# Altium PCB pcb.PCBDOC
Units mil, origin at the board's own origin, x right, y up, seen from the top; angles counter-clockwise.
Board outline 1496.06 x 669.29 mil, 10 copper layers (TopLayer, MidLayer1, MidLayer2, MidLayer3, MidLayer4, MidLayer5, MidLayer6, MidLayer7, MidLayer8, BottomLayer); 12 components, 12 nets, 46 pads, 0 vias.
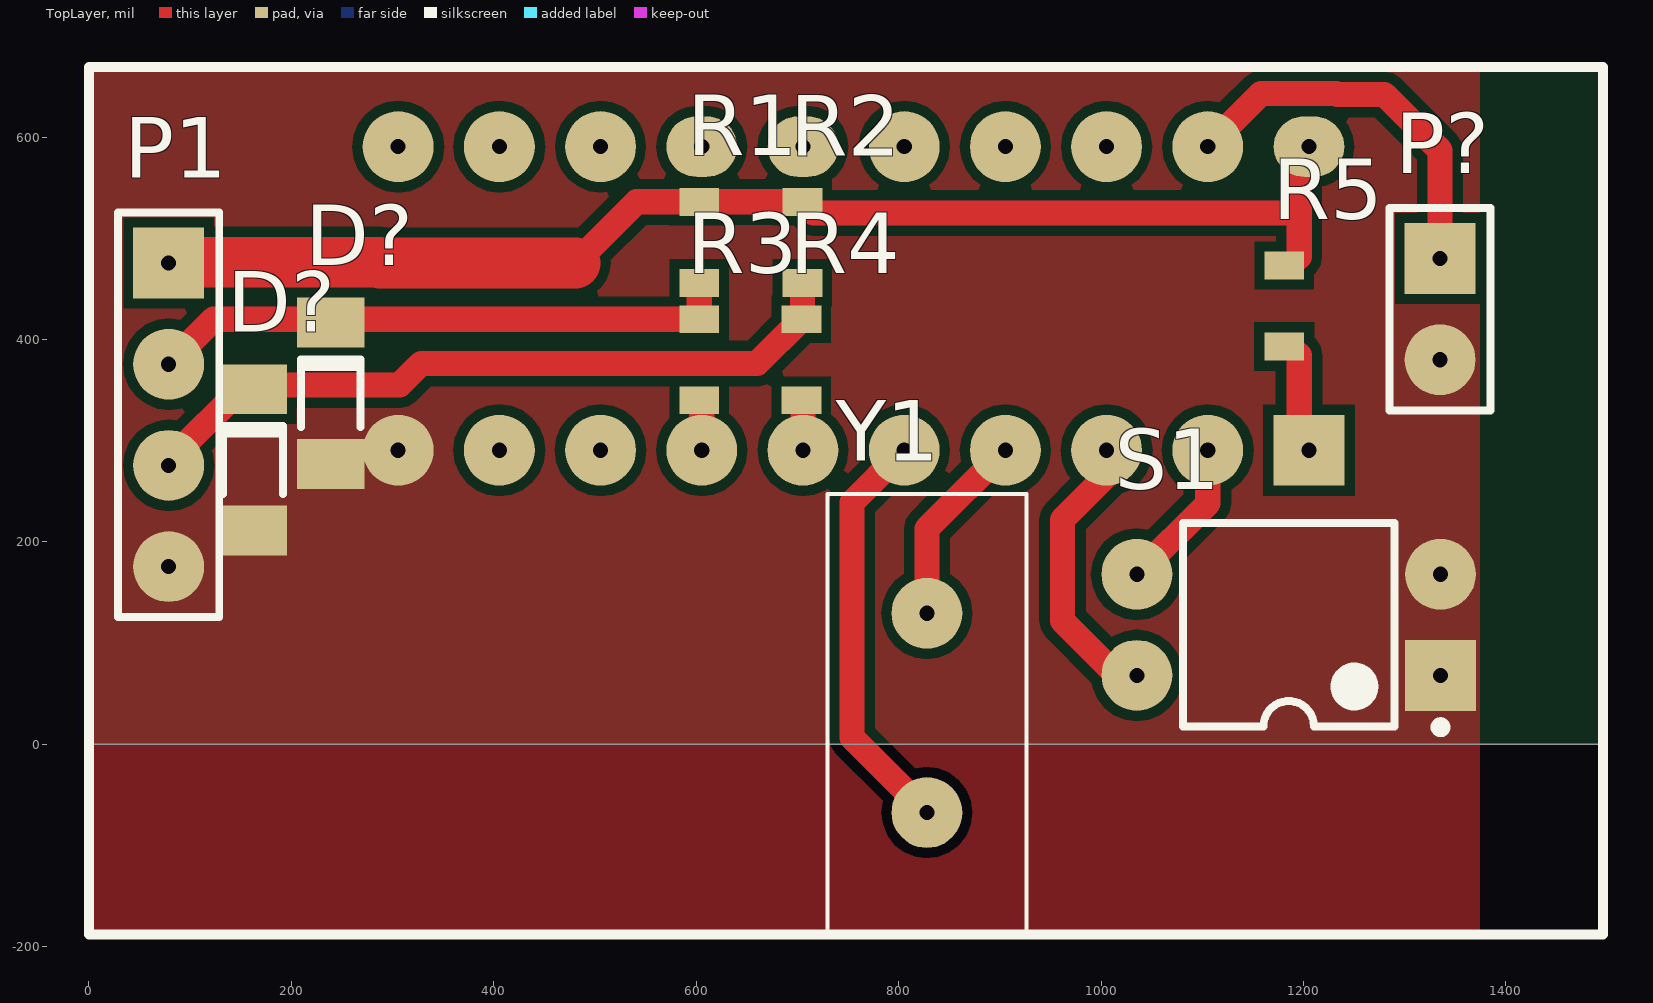
[diagram p0: TopLayer view]
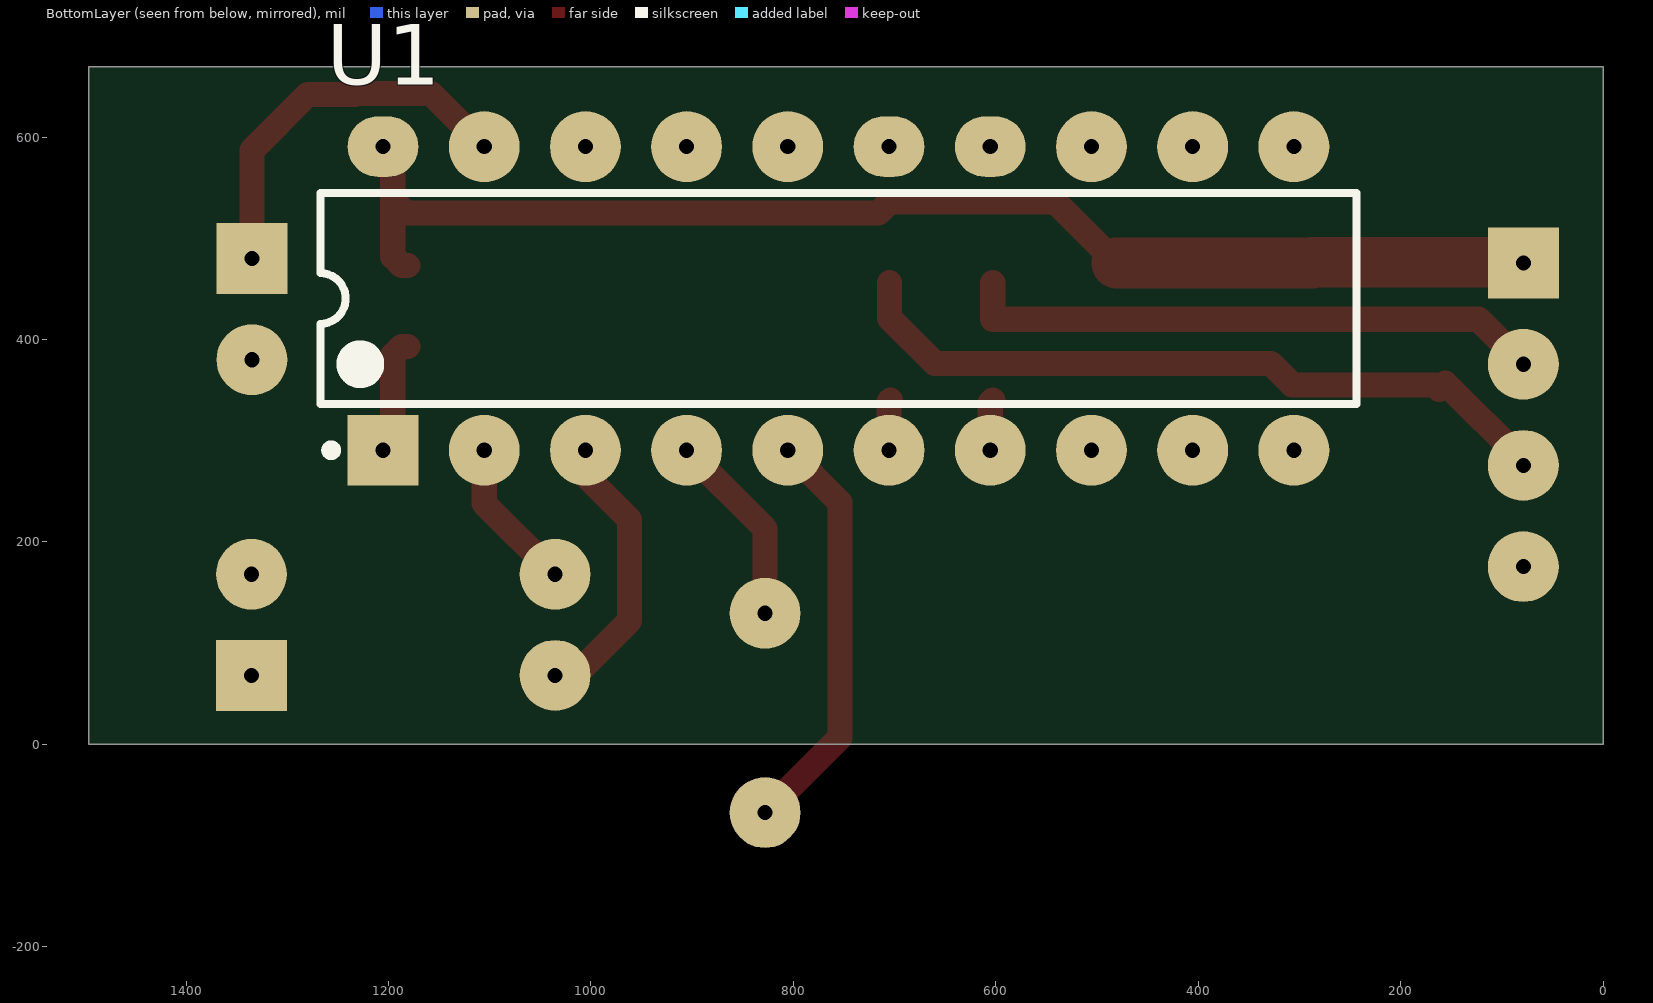
[diagram p1: BottomLayer view, seen from below]

## Layer stack, top to bottom
TopSolder: solder mask 0.4, Solder Resist, Dk 3.5
TopLayer: signal copper 1.4
Dielectric1: core 12.6, FR-4, Dk 4.8
MidLayer1: signal copper 1.4
Dielectric2: prepreg 12.6, FR-4, Dk 4.8
MidLayer2: signal copper 1.4
Dielectric3: core 12.6, FR-4, Dk 4.8
MidLayer3: signal copper 1.4
Dielectric4: prepreg 12.6, FR-4, Dk 4.8
MidLayer4: signal copper 1.4
Dielectric5: core 12.6, FR-4, Dk 4.8
MidLayer5: signal copper 1.4
Dielectric6: prepreg 12.6, FR-4, Dk 4.8
MidLayer6: signal copper 1.4
Dielectric7: core 12.6, FR-4, Dk 4.8
MidLayer7: signal copper 1.4
Dielectric8: prepreg 12.6, FR-4, Dk 4.8
MidLayer8: signal copper 1.4
Dielectric9: core 12.6, FR-4, Dk 4.8
BottomLayer: signal copper 1.4
BottomSolder: solder mask 0.4, Solder Resist, Dk 3.5

## Board outline
0,0 0,669.29 1496.06,669.29 1496.06,0

## Design rules (kind name [scope] priority, off if disabled: settings)
Clearance [All] p1: gap=10 ignorepadtopadclearanceinfootprint=FALSE except(0: Arc-Hole Track-Hole SMDPad-Hole THPad-Hole Via-Hole Fill-Hole Poly-Hole Region-Hole Text-Hole)
ComponentClearance [All] p1 off: gap=10 collisioncheckmode=3 verticalgap=10 showdistances=FALSE
FabricationTestPointUsage TestPointUsage [All] p1: valid=0 allowmultiple=FALSE
FabricationTestpoint Testpoint [All] p1: side=3 testpointundercomponent=TRUE minsize=40 maxsize=100 preferedsize=60 minholesize=20 maxholesize=40 preferedholesize=32 testpointgrid=1 allowsidetop=TRUE allowsidebottom=TRUE usegrid=TRUE gridtolerance=0.01
Height [All] p1 off: minheight=0 maxheight=1000 prefheight=500
PasteMaskExpansion PasteMaskExpansion_1 [InComponent('P1')] p1: expansion=-150
PasteMaskExpansion [All] p2: expansion=0
PlaneClearance [All] p1: clearance=10
PolygonConnect [All] p1: connectstyle=Direct reliefconductorwidth=10 reliefentries=4 polygonreliefangle="90 Angle" airgapwidth=10
RoutingVias [All] p1: holewidth=28 width=50 viastyle="Through Hole" minholewidth=28 minwidth=50 maxholewidth=28 maxwidth=50
SilkToSolderMaskClearance SilkscreenOverComponentPads [IsPad] p1: minsilkscreentomaskgap=10 clearancetoexposedcopper=TRUE
SolderMaskExpansion [All] p1: expansion=2
Width [All] p1 off: maxlimit=10 minlimit=10 preferedwidth=10
23 further rules are at their usual default settings.

## Components (designator, comment, footprint, x,y, rotation, side; value= is the part's Value field where it differs from the comment)
D? "Diode" SOD80C 239,347 r90 top
D? "Diode" SOD80C 162,281 r90 top
P1 "Header 4" HDR1X4 78.74,475.59 r270 top
P? "Header 2" HDR1X2 1335,480 r270 top
R1 "Res1" 0603x 603,496 r90 top value=1K
R2 "Res1" 0603x 705,496 r90 top value=1K
R3 "Res1" 0603x 603,380 r90 top value=1K
R4 "Res1" 0603x 704,380 r90 top value=1K
R5 "Res1" 0603x 1181.1,433.07 r270 top value=1K
S1 "SW DIP-2" DIP-4 1185.47,118.11 r180 top
U1 "ATtiny2313-20PI" 20P3 755.51,440.55 r90 bottom
Y1 "XTAL" CRYSTAL 828,31 r90 top

## Footprints (in the part's own frame and the unit in brackets; to place one, negate y for a bottom-side part, rotate by r counter-clockwise, add the part's x,y. Pads: shape width x height; smd on the part's side, far side on the other; paste and mask are expansions set on the pad)
20P3 [mil] "DIP, 20-Leads, Row Spacing 7.62mm, Pitch 2.54mm, Body 25.9x6.61mm"
  rect 70x70 hole 15: 1(-150,450)
  round 70 hole 15: 2(-150,350) 3(-150,250) 4(-150,150) 5(-150,50) 6(-150,-50) 7(-150,-150) 8(-150,-250) 9(-150,-350) 10(-150,-450) 11(150,-450) 12(150,-350) 13(150,-250) 16(150,50) 17(150,150) 18(150,250) 19(150,350)
  oval 60x70 hole 15: 14(150,-150) 15(150,-50) 20(150,450)
  silkscreen extent -155,-512 104,512, body extent -142,-510 142,510, height 210
0603x [mm] "Chip Resistor; Body 1.6 x 0.8 mm (LxW typ)"
  rect 0.7x1 smd: 1(-1.016,0) 2(1.016,0)
CRYSTAL [mil]
  round 70 hole 15: 1(98.43,0) 2(-98.43,0)
  silkscreen extent -217,-98 217,98
DIP-4 [mil] "DIP; 4 Leads; Row Spacing 7.62 mm; Pitch 2.54 mm"
  rect 70x70 hole 15: 1(-150,50)
  round 70 hole 15: 2(-150,-50) 3(150,-50) 4(150,50)
  silkscreen extent -155,-100 104,106, body extent -124,-98 124,98, height 220
HDR1X2 [mil] "Connector; Header; 2 Position"
  rect 70x70 hole 15: 1(0,0)
  round 70 hole 15: 2(100,0)
  silkscreen extent -50,-50 150,50
HDR1X4 [mil] "Connector; Header; 4 Position"
  rect 70x70 hole 15: 1(0,0)
  round 70 hole 15: 2(100,0) 3(200,0) 4(300,0)
  silkscreen extent -50,-50 350,50
SOD80C [mm] "Metal Electrode Face (MELF) Diode; Body 3.5 x 1.6 mm (LxDia)"
  rect 1.25x1.7 smd: 1(-1.775,0) 2(1.775,0)
  silkscreen extent -0.85,-0.75 0.85,0.75

## Part data
D? D?: "Default Diode", Code_JEDEC=DO-214-AB, LatestRevisionDate=17-Jul-2002, LatestRevisionNote="Re-released for DXP Platform.", PackageDescription="DO-214-AB/SMC; 2 C-Bend Leads; Body 7.9 x 5.9 mm, inc. leads (LxW)", PackageReference=SMC, PackageVersion=Sep-1996, Published=8-Jun-2000, Publisher="Altium Limited"
P1: "Header, 4-Pin", LatestRevisionDate=17-Jul-2002, LatestRevisionNote="Re-released for DXP Platform.", Publisher="Altium Limited"
P?: "Header, 2-Pin", LatestRevisionDate=17-Jul-2002, LatestRevisionNote="Re-released for DXP Platform.", Publisher="Altium Limited"
R1 R2 R3 R4 R5: "Resistor", LatestRevisionDate=17-Jul-2002, LatestRevisionNote="Re-released for DXP Platform.", PackageDescription="Axial Device, Thru-Hole; 2 Leads; 0.3 in Pin Spacing", PackageReference=AXIAL-0.3, Published=8-Jun-2000, Publisher="Altium Limited"
S1: "DIP Switch, 2 Position, SPST", LatestRevisionDate=17-Jul-2002, LatestRevisionNote="Re-released for DXP Platform.", PackageReference=DIP-4, Published=24-Mar-1999, Publisher="Altium Limited"
U1: "Low Power tinyAVR® 8-Bit Microcontroller, 2K Flash Memory, 20MHz, Industrial Temperature, 20-Lead PDIP", Supplier Part Number 1=ATTINY2313-20PI-ND, Code_JEDEC=MS-001-AD, ComponentLink1Description="Manufacturer Link", ComponentLink1URL=http://www.atmel.com/products/AVR/tinyavr.asp?, ComponentLink2Description=Datasheet, ComponentLink2URL=http://www.atmel.com/dyn/resources/prod_documents/doc2543.pdf, ComponentLink3Description="Atmel.com Home", ComponentLink3URL=http://www.atmel.com, DatasheetVersion="DOC2543B, Mar-2009", PackageDescription="20-lead (0.300\"/7.62mm Wide) Plastic Dual Inline Package (PDIP)", PackageReference=20P3, PackageVersion="revC, Jan-2004", Published=20-Nov-2009, Publisher="Altium Limited", Supplier 1=Digi-Key, Supplier 2=Mouser, Supplier Part Number 2=556-ATTINY2313-20PI
Y1: "Crystal Oscillator", LatestRevisionDate=17-Jul-2002, LatestRevisionNote="Re-released for DXP Platform.", PackageDescription="Crystal, Thru-Hole; 2 Leads; Body 3.1 x 8.2 mm (Dia.xH)", PackageReference=R38, Published=8-Jun-2000, Publisher="Altium Limited"

## Nets (pads, with @x,y where several pads share a name; then routed paths per layer and width w, separated by ;. In a path a pad name is that pad's centre, name@x,y a point inside that pad or via, vN(x,y) a via of type N, cw(c..) or ccw(c..) an arc to the next point about the centre after c; other vN are vias at no path point)
BTN: P?.1 U1.19 | length 381.5
  TopLayer w25: U1.19 1158.01,643.05 1232.26,643.05 1233.31,642 1280,642 1335,587 P?.1
D+: R4.1 U1.6 | length 50.1
  TopLayer w25: R4.1 705.51,338.49 U1.6
D-: R3.1 U1.7 | length 50.5
  TopLayer w25: R3.1 605.51,337.49 U1.7
DIP1: S1.4 U1.3 | length 282.4
  TopLayer w25: U1.3 1005.51,265.51 962,222 962,122 1015.89,68.11 S1.4
DIP2: S1.3 U1.2 | length 151.5
  TopLayer w25: S1.3 1105.51,238.15 U1.2
GND: D?.1 P1.4 P?.2 S1.1 S1.2 U1.10 | length 15
  TopLayer w10: U1.10@290.55,290.55 U1.10
NetD?_2: D?.2@162,350.88 P1.3 R2.1 R4.2 | length 720.4
  TopLayer w25: P1.3 78.74,279.74 D?.2@155.94,356.94 ; D?.2@162,350.88 166.12,355 307,355 328.28,376.28 660.28,376.28 R4.2 705,421 R2.1
NetD?_2: D?.2@239,416.88 P1.2 R1.1 R3.2 | length 578.7
  TopLayer w25: P1.2 123.15,420 R3.2 R1.1
NetR5_2: R5.2 U1.1 | length 116.1
  TopLayer w25: R5.2 1187.01,393.07 1195.79,384.29 1195.79,300.28 U1.1
NetU1_4: U1.4 Y1.1 | length 204.5
  TopLayer w25: Y1.1 828,213.04 U1.4 ; Y1.1@840.43,118.11 Y1.1@840.43,129.43
NetU1_5: U1.5 Y1.2 | length 410
  TopLayer w25: U1.5 754,239.04 754,6.57 Y1.2
VCC: P1.1 R1.2 R2.2 R5.1 U1.20 | length 1283.8
  TopLayer w25: 480.59,475.59 541,536 R1.2 R2.2 716,525 1182.79,525 1195.79,538 ; R5.1 1187.01,473.07 1195.79,481.85 1195.79,538 ; U1.20 1205.51,577.28 1195.79,567.55 1195.79,538
  TopLayer w50: P1.1 79.64,476.49 286.96,476.49 287.86,475.59 480.59,475.59
pads on no net: U1.8 U1.9 U1.11 U1.12 U1.13 U1.14 U1.15 U1.16 U1.17 U1.18

## Polygon pours and split planes (outlines as drawn)
GND on TopLayer "G" (solid, pour order 0): 0,669.29 1374,669.29 1374,-191 0,-191

## Silkscreen, mask and mechanical layers (free items; w line width, h text height)
TopOverlay:
  lines w10: 0,-188 0,669.29 1496.06,669.29 1496.06,-188 0,-188
Mechanical3:
  lines w10: 5750,-2825 5775,-2825